# EAGLE board akabeacon_mini_MDBT40 (EAGLE 7.2.0)
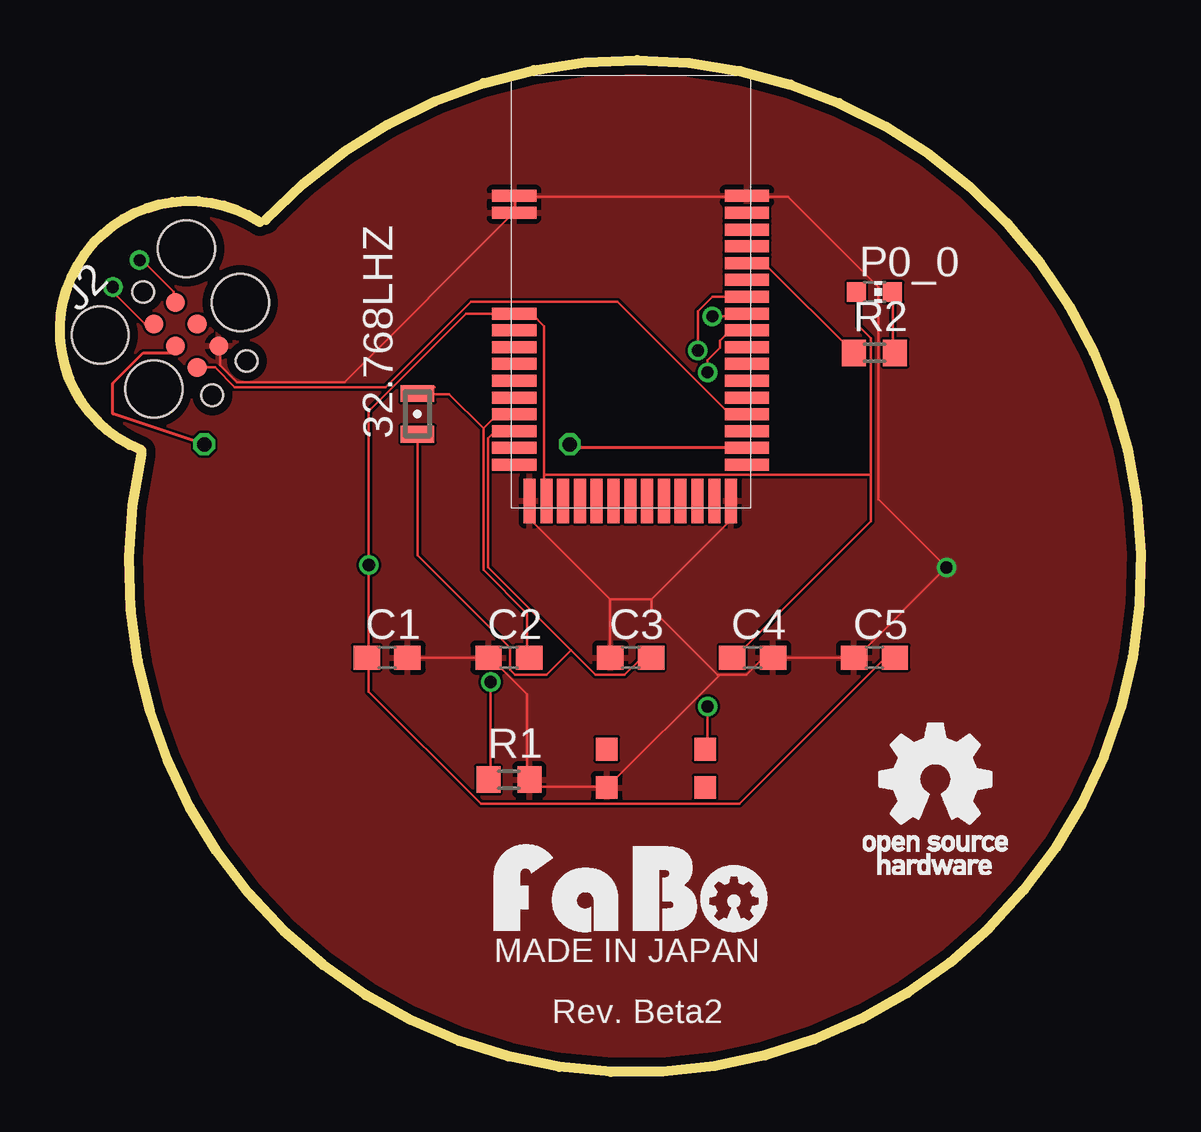
[diagram p0: board, top side]
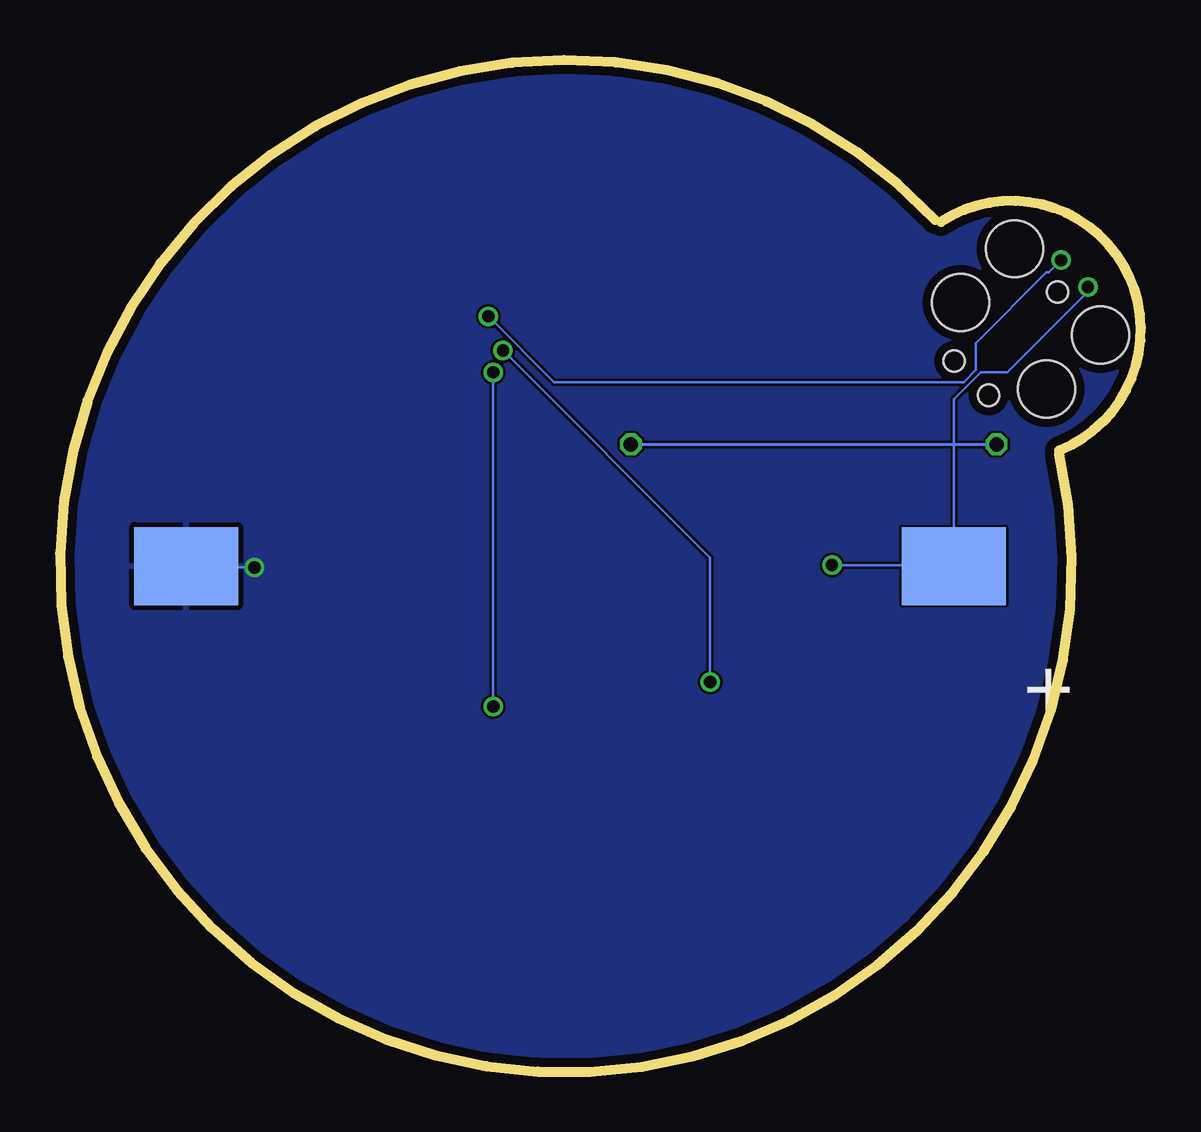
[diagram p1: board, bottom side, seen from below]

Size 45.05 x 42.16 mm. Coordinates in mm from the lower left corner, seen from the top.
Outline: 8.58,35.5 arc-330 3.4,25.74
Outline: 3.4,25.9 arc-191 8.32,35.42
Copper layers (1*16): Top 0.035mm / dielectric 1.5mm / Bottom 0.035mm
Design rules "default *": minimum track width 4mil, minimum drill 20mil, track to track 4mil, track to pad 4mil, pad to pad 4mil, via to via 4mil, smd to smd 4mil, copper to edge 15mil, drill to drill 5mil, minimum pad ring 8mil, minimum via ring 6mil, stop-mask expansion 4mil, vias tented up to drill 0mil, thermal gap 8mil

## Footprints (pad centres in the part's own frame; a part is rotated, then mirrored left to right if it is on the bottom)
FC-12M = smd 0.7 x 1.4: 1 -0.85,0; 2 0.85,0
C0603 = smd 1.1 x 1: 1 -0.85,0; 2 0.85,0
TC2030-MCP = smd 0.787 x 0.787: 1 1.27,-0.635; 2 1.27,0.635; 3 2.54,-0.635; 4 2.54,0.635; 5 3.81,-0.635; 6 3.81,0.635 | hole 0.889: 0,0; 5.08,-1.016; 5.08,1.016 | hole 2.375: 0,2.54; 0,-2.54; 3.175,-2.54; 3.175,2.54
CHIP-LED0603 = smd 0.8 x 0.8: A 0,-0.75; C 0,0.75
R0603 = smd 1 x 1.1: 1 -0.85,0; 2 0.85,0
RAYTAC-MDBT40 = smd 1.85 x 0.5: 1 -4.86,4; 2 -4.86,3.3; 3 -4.86,-0.9; 4 -4.86,-1.6; 5 -4.86,-2.3; 6 -4.86,-3; 7 -4.86,-3.7; 8 -4.86,-4.4; 9 -4.86,-5.1; 10 -4.86,-5.8; 11 -4.86,-6.5; 12 -4.86,-7.2; 26 4.84,-7.2; 27 4.84,-6.5; 28 4.84,-5.8; 29 4.84,-5.1; 30 4.84,-4.4; 31 4.84,-3.7; 32 4.84,-3; 33 4.84,-2.3; 34 4.84,-1.6; 35 4.84,-0.9; 36 4.84,-0.2; 37 4.84,0.5; 38 4.84,1.2; 39 4.84,1.9; 40 4.84,2.6; 41 4.84,3.3; 42 4.84,4 | smd 0.5 x 1.85: 13 -4.22,-8.71; 14 -3.52,-8.71; 15 -2.82,-8.71; 16 -2.12,-8.71; 17 -1.42,-8.71; 18 -0.72,-8.71; 19 -0.02,-8.71; 20 0.68,-8.71; 21 1.38,-8.71; 22 2.08,-8.71; 23 2.78,-8.71; 24 3.48,-8.71; 25 4.18,-8.71
SMTU2450-BOTTOM-MINI = smd 3.251 x 4.318 bottom: P$_GND 0,-16; P$_VCC 0,16
SWITCH-4P(KMR2) = smd 0.9 x 0.95: 1 -1,0; 2 3.1,0; 3 -1,-1.6; 4 3.1,-1.6

## Placement (x,y rotation side)
32.768LHZ  FC-12M  [FC-12M]  14.9,27.42 90 top
C1  0.1uf  [C0603]  13.63,17.26 0 top
C2  12pf  [C0603]  18.71,17.26 0 top
C3  12pf  [C0603]  23.79,17.26 0 top
C4  0.1uf  [C0603]  28.87,17.26 0 top
C5  0.1uf  [C0603]  33.95,17.26 0 top
J2  [TC2030-MCP]  3.47,32.5 315 top
P0_0  [CHIP-LED0603]  33.95,32.5 270 top
R1  [R0603]  18.71,12.18 0 top
R2  [R0603]  33.95,29.96 0 top
U$1  RAYTAC-MDBT40  [RAYTAC-MDBT40]  23.79,32.5 0 top
U$2  [LOGO_FABO_M]  23.79,5.83 0 top
U$3  SMTU2450-BOTTOM-MINI  [SMTU2450-BOTTOM-MINI]  23.79,21.07 90 top
U$4  [LOGO_OSHW_T_M]  36.49,12.18 0 top
U$5  SWICTH-4P(KMR2)  [SWITCH-4P(KMR2)]  23.79,13.45 0 top

## Library data of the parts
32.768LHZ = crystal
C1-C5 R1 R2 = adafruit
J2 = tag-connect
P0_0 = led
U$1 = gclueBT
U$2 = FaBo
U$3 U$4 = gclue
U$5 = gclue-test

## Nets
+3V3: C1.1 C4.1 C5.2 J2.1 P0_0.A U$1.3 U$1.14 U$3.P$_VCC
GND: C1.2 C2.1 C3.1 C4.2 C5.1 J2.6 R1.2 U$1.1 U$1.2 U$1.13 U$1.25 U$1.42 U$3.P$_GND U$5.3
LED1: P0_0.C R2.2
N$7: 32.768LHZ.2 C2.2 U$1.9
N$8: 32.768LHZ.1 C3.2 U$1.10
P0_00: U$1.17
P0_01: U$1.18
P0_02: U$1.19
P0_03: U$1.20
P0_04: U$1.21
P0_05: U$1.22
P0_06: U$1.23
P0_07: U$1.24
P0_08: U$1.26
P0_09: J2.3 U$1.27
P0_10: U$1.28
P0_11: J2.5 U$1.29
P0_12: U$1.30
P0_13: U$1.31
P0_14: U$1.32
P0_15: U$1.33
P0_16: U$1.34 U$5.2
P0_18: R2.1 U$1.38
P0_19: U$1.39
P0_21: U$1.4
P0_22: U$1.5
P0_23: U$1.6
P0_24: U$1.7
P0_25: U$1.8
P0_28: U$1.11
P0_29: U$1.12
P0_30: U$1.16
SWCLK: R1.1 U$1.36
SWDCLK: J2.4
SWDIO: J2.2 U$1.35

## Tracks (layer width: path | path; a pad name or v marks a point on that pad's centre or on a via)
+3V3  (via drill 0.51)
  Top 0.102: v2.2,32.7 2.2,32.5 3.52,31.18 3.83,31.18 J2.1 | 33.8,24.88 33.8,22.95 28.11,17.26 C4.1 | 33.8,24.88 33.8,30.57 33.29,31.08 33.29,32.5 P0_0.A | 12.87,17.26 v12.87,21.12 12.87,27.52 16.94,31.59 18.87,31.59 U$1.3 18.97,31.59 19.68,31.59 20.19,31.08 20.19,24.88 | C5.2 34.41,17.26 28.31,11.16 17.55,11.16 12.87,15.84 12.87,17.26 | 12.87,17.26 C1.1 | 20.19,24.88 20.19,23.86 U$1.14 | 20.19,24.88 33.8,24.88
  Bottom 0.102: v2.2,32.7 2.2,32.5 5.56,29.15 6.67,29.15 7.79,28.03 7.79,21.12 U$3.P$_VCC 7.89,21.12 v12.87,21.12
GND  (via drill 0.51)
  Top 0.102: J2.6 6.67,30.16 6.67,29.45 7.39,28.74 11.86,28.74 18.87,35.75 U$1.2 18.97,35.85 18.97,36.46 | 18.97,36.46 28.62,36.46 U$1.42 28.72,36.46 30.35,36.46 34.11,32.7 34.11,23.86 v36.95,21.02 33.19,17.26 C5.1 C4.2 29.33,17.26 28.62,16.55 27.5,16.55 | 18.97,36.46 U$1.1 | C1.2 C2.1 17.95,17.26 19.48,15.74 19.48,12.18 R1.2 19.58,12.18 19.88,11.88 22.73,11.88 U$5.3 22.83,11.88 27.5,16.55 | 22.93,19.7 22.93,17.26 C3.1 | 22.93,19.7 19.58,23.05 19.58,23.76 U$1.13 | 24.66,19.7 27.91,22.95 27.91,23.76 U$1.25 | 22.93,19.7 24.66,19.7 | 27.5,16.55 27.4,16.55 24.66,19.29 24.66,19.7
  Bottom 0.102: v36.95,21.02 39.69,21.02 U$3.P$_GND
  pour Bottom: -0.34,-0.52 46.65,-0.52 46.65,42.66 -0.34,42.66
  pour Top: -0.34,-0.52 46.65,-0.52 46.65,42.66 -0.34,42.66
LED1
  Top 0.102: P0_0.C 34.72,32.5 34.72,29.96 R2.2
N$1
  Top 0.102: 15.61,28.54 15.61,28.53
N$7
  Top 0.102: 17.65,26.81 17.65,20.92 19.48,19.09 19.48,17.26 C2.2 | 17.65,26.81 18.15,27.32 18.87,27.32 U$1.9 | 17.65,26.81 16.22,28.23 14.9,28.23 32.768LHZ.2
N$8
  Top 0.102: C3.2 24.25,17.26 23.54,16.55 22.32,16.55 21.3,17.57 | 21.3,17.57 17.85,21.02 17.85,26.4 18.05,26.61 18.87,26.61 U$1.10 | 32.768LHZ.1 14.9,21.53 18.76,17.67 18.76,16.75 18.97,16.55 20.29,16.55 21.3,17.57
P0_09  (via drill 0.6)
  Top 0.127: U$1.27 21.25,26 v21.25,26.15 | v6.01,26.15 2.2,27.42 2.2,28.69 3.47,29.96 4.74,29.96 J2.3
  Bottom 0.127: v21.25,26.15 v6.01,26.15
P0_11
  Top 0.102: J2.5 5.76,29.35 6.47,29.35 7.28,28.54 13.58,28.54 17.14,32.09 23.23,32.09 27.91,27.42 28.62,27.42 U$1.29
P0_16  (via drill 0.51)
  Top 0.102: v26.99,15.23 26.99,13.5 U$5.2 | v26.99,29.15 26.99,29.66 27.5,30.16 27.5,30.47 27.91,30.87 28.62,30.87 U$1.34
  Bottom 0.102: v26.99,29.15 v26.99,15.23
P0_18
  Top 0.102: R2.1 33.09,29.96 29.43,33.62 28.72,33.62 U$1.38
SWCLK  (via drill 0.51)
  Top 0.102: v17.95,16.24 17.95,12.18 R1.1 | v26.59,30.06 26.59,31.69 27.2,32.3 28.62,32.3 U$1.36
  Bottom 0.102: v17.95,16.24 17.95,21.43 v26.59,30.06
SWDIO  (via drill 0.51)
  Top 0.102: v3.32,33.82 3.42,33.82 4.74,32.5 4.74,32.09 J2.2 | v27.2,31.48 28.52,31.48 28.62,31.59 U$1.35
  Bottom 0.102: v3.32,33.82 3.83,33.31 3.93,33.31 6.88,30.37 6.88,29.25 7.39,28.74 24.45,28.74 v27.2,31.48

## Text on the board
tPlace: MADE IN JAPAN | Rev. Beta2